# Altium PCB 175-00033, rev2, Crate Slot Power Interface.PcbDoc (part 2 of 2)
Units mm, origin at the board's own origin, x right, y up, seen from the top; angles counter-clockwise.
Board outline 150 x 100 mm, 4 copper layers (Top Layer (*.GTL), Internal Plane 1 (*.GP1), Internal Plane 2 (*.GP2), Bottom Layer (*GBL)); 16 components, 13 nets, 1052 pads, 23 vias.
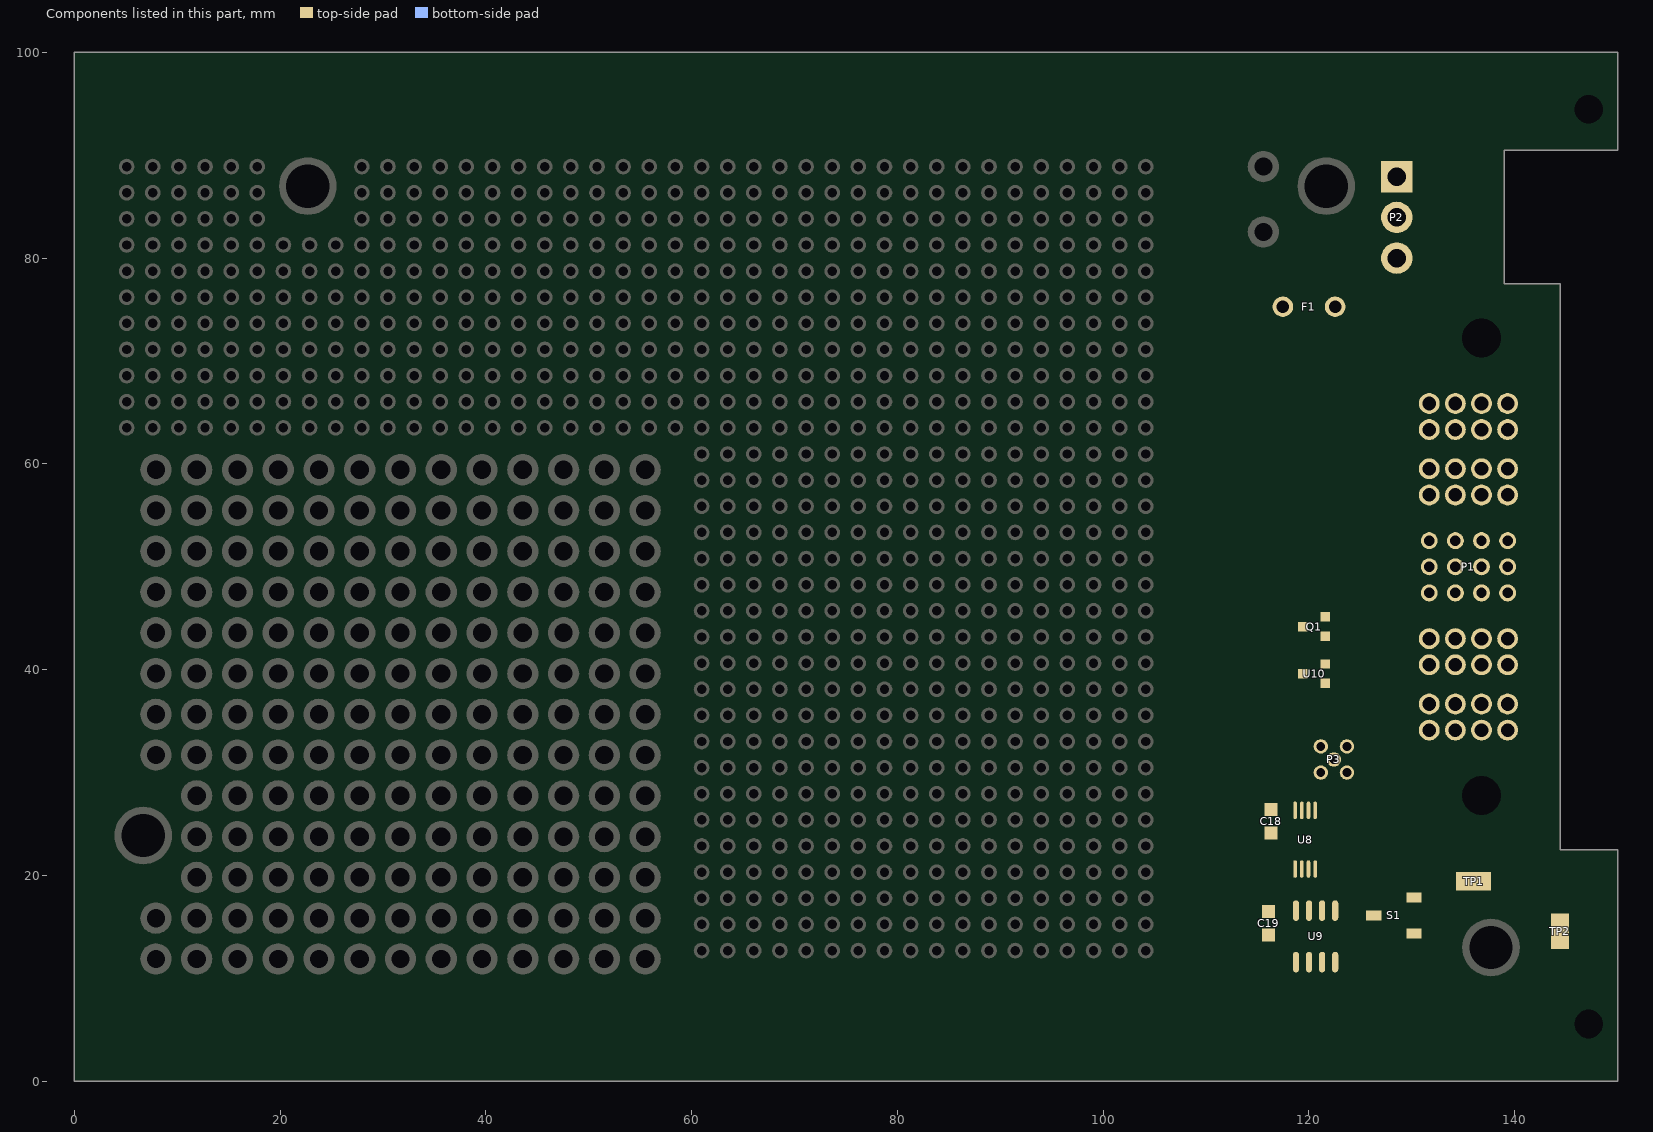
[diagram p4: the components of this part, seen from the top]

## Via types
v1: diameter 0.61, hole 0.254, Top Layer (*.GTL) to Bottom Layer (*GBL), 10 vias
v2: diameter 0.762, hole 0.381, Top Layer (*.GTL) to Bottom Layer (*GBL), 9 vias
v3: diameter 1.27, hole 0.711, Top Layer (*.GTL) to Bottom Layer (*GBL), 3 vias
v4: diameter 0.508, hole 0.254, Top Layer (*.GTL) to Bottom Layer (*GBL), 1 vias

## Nets (pads, with @x,y where several pads share a name; then routed paths per layer and width w, separated by ;. In a path a pad name is that pad's centre, name@x,y a point inside that pad or via, vN(x,y) a via of type N, cw(c..) or ccw(c..) an arc to the next point about the centre after c; other vN are vias at no path point) (continued)
copper on no net: | length 2262.8
  Top Layer (*.GTL) w0.508: 5.08,63.5 7.62,63.5 ; 5.08,66.04 7.62,66.04 ; 5.08,68.58 7.62,68.58 ; 5.08,71.12 7.62,71.12 ; 5.08,73.66 7.62,73.66 ; 5.08,76.2 7.62,76.2 ; 5.08,78.74 7.62,78.74 ; 5.08,81.28 7.62,81.28 ; 5.08,83.82 7.62,83.82 ; 5.08,86.36 7.62,86.36 ; 5.08,88.9 7.62,88.9 ; 10.16,63.335 10.16,78.74 10.16,88.9 ; 12.7,63.335 12.7,78.74 12.7,88.9 ; 15.24,63.5 22.86,63.5 ; 15.24,66.04 22.86,66.04 ; 15.24,68.58 22.86,68.58 ; 15.24,71.12 22.86,71.12 ; 15.24,73.66 22.86,73.66 ; 15.24,76.2 22.86,76.2 ; 15.24,78.74 22.86,78.74 ; 15.24,81.28 22.86,81.28 ; 15.24,83.82 17.78,83.82 ; 15.24,86.36 17.78,86.36 ; 15.24,88.9 17.78,88.9 ; 25.4,63.762 25.4,78.74 ; 27.94,64.085 27.94,78.74 27.94,89 ; 30.48,63.5 38.1,63.5 ; 30.48,66.04 38.1,66.04 ; 30.48,68.58 38.1,68.58 ; 30.48,71.12 38.1,71.12 ; 30.48,73.66 38.1,73.66 ; 30.48,76.2 38.1,76.2 ; 30.48,78.74 38.1,78.74 ; 30.48,81.28 38.1,81.28 ; 30.48,83.82 38.1,83.82 ; 30.48,86.36 38.1,86.36 ; 30.48,88.9 38.1,88.9 ; 40.64,63.5 40.64,78.74 40.64,89 ; 43.18,63.335 43.18,78.74 43.18,89 ; 45.72,63.5 53.34,63.5 ; 45.72,66.04 53.34,66.04 ; 45.72,68.58 53.34,68.58 ; 45.72,71.12 53.34,71.12 ; 45.72,73.66 53.34,73.66 ; 45.72,76.2 53.34,76.2 ; 45.72,78.74 53.34,78.74 ; 45.72,81.28 53.34,81.28 ; 45.72,83.82 53.34,83.82 ; 45.72,86.36 53.34,86.36 ; 45.72,88.9 53.34,88.9 ; 55.88,63.5 55.88,78.74 55.88,89 ; 58.42,63.335 58.42,78.74 58.42,89 ; 60.96,12.7 68.58,12.7 ; 60.96,15.24 68.58,15.24 ; 60.96,17.78 68.58,17.78 ; 60.96,20.32 68.58,20.32 ; 60.96,22.86 68.58,22.86 ; 60.96,25.4 68.58,25.4 ; 60.96,27.94 68.58,27.94 ; 60.96,30.48 68.58,30.48 ; 60.96,33.02 68.58,33.02 ; 60.96,35.56 68.58,35.56 ; 60.96,38.1 68.58,38.1 ; 60.96,40.64 68.58,40.64 ; 60.96,43.18 68.58,43.18 ; 60.96,45.72 68.58,45.72 ; 60.96,48.26 68.58,48.26 ; 60.96,50.8 68.58,50.8 ; 60.96,53.34 68.58,53.34 ; 60.96,55.88 68.58,55.88 ; 60.96,58.42 68.58,58.42 ; 60.96,60.96 68.58,60.96 ; 60.96,63.5 68.58,63.5 ; 60.96,66.04 68.58,66.04 ; 60.96,68.58 68.58,68.58 ; 60.96,71.12 68.58,71.12 ; 60.96,73.66 68.58,73.66 ; 60.96,76.2 68.58,76.2 ; 60.96,78.74 68.58,78.74 ; 60.96,81.28 68.58,81.28 ; 60.96,83.82 68.58,83.82 ; 60.96,86.36 68.58,86.36 ; 60.96,88.9 68.58,88.9 ; 71.12,12.7 71.12,27.94 71.12,45.72 71.12,60.96 71.12,78.74 71.12,89 ; 73.66,12.7 73.66,27.94 73.66,45.72 73.66,60.96 73.66,78.74 73.66,89 ; 76.2,12.7 83.82,12.7 ; 76.2,15.24 83.82,15.24 ; 76.2,17.78 83.82,17.78 ; 76.2,20.32 83.82,20.32 ; 76.2,22.86 83.82,22.86 ; 76.2,25.4 83.82,25.4 ; 76.2,27.94 83.82,27.94 ; 76.2,30.48 83.82,30.48 ; 76.2,33.02 83.82,33.02 ; 76.2,35.56 83.82,35.56 ; 76.2,38.1 83.82,38.1 ; 76.2,40.64 83.82,40.64 ; 76.2,43.18 83.82,43.18 ; 76.2,45.72 83.82,45.72 ; 76.2,48.26 83.82,48.26 ; 76.2,50.8 83.82,50.8 ; 76.2,53.34 83.82,53.34 ; 76.2,55.88 83.82,55.88 ; 76.2,58.42 83.82,58.42 ; 76.2,60.96 83.82,60.96 ; 76.2,63.5 83.82,63.5 ; 76.2,66.04 83.82,66.04 ; 76.2,68.58 83.82,68.58 ; 76.2,71.12 83.82,71.12 ; 76.2,73.66 83.82,73.66 ; 76.2,76.2 83.82,76.2 ; 76.2,78.74 83.82,78.74 ; 76.2,81.28 83.82,81.28 ; 76.2,83.82 83.82,83.82 ; 76.2,86.36 83.82,86.36 ; 76.2,88.9 83.82,88.9 ; 86.36,12.7 86.36,27.94 86.36,45.72 86.36,60.96 86.36,78.74 86.36,89 ; 88.9,12.7 88.9,27.94 88.9,45.72 88.9,60.96 88.9,78.74 88.9,89 ; 91.44,12.7 99.06,12.7 ; 91.44,15.24 99.06,15.24 ; 91.44,17.78 99.06,17.78 ; 91.44,20.32 99.06,20.32 ; 91.44,22.86 99.06,22.86 ; 91.44,25.4 99.06,25.4 ; 91.44,27.94 99.06,27.94 ; 91.44,30.48 99.06,30.48 ; 91.44,33.02 99.06,33.02 ; 91.44,35.56 99.06,35.56 ; 91.44,38.1 99.06,38.1 ; 91.44,40.64 99.06,40.64 ; 91.44,43.18 99.06,43.18 ; 91.44,45.72 99.06,45.72 ; 91.44,48.26 99.06,48.26 ; 91.44,50.8 99.06,50.8 ; 91.44,53.34 99.06,53.34 ; 91.44,55.88 99.06,55.88 ; 91.44,58.42 99.06,58.42 ; 91.44,60.96 99.06,60.96 ; 91.44,63.5 99.06,63.5 ; 91.44,66.04 99.06,66.04 ; 91.44,68.58 99.06,68.58 ; 91.44,71.12 99.06,71.12 ; 91.44,73.66 99.06,73.66 ; 91.44,76.2 99.06,76.2 ; 91.44,78.74 99.06,78.74 ; 91.44,81.28 99.06,81.28 ; 91.44,83.82 99.06,83.82 ; 91.44,86.36 99.06,86.36 ; 91.44,88.9 99.06,88.9 ; 101.6,12.7 101.6,27.94 101.6,45.72 101.6,60.96 101.6,78.74 101.6,89 ; 104.14,12.7 104.14,27.94 104.14,45.72 104.14,60.96 104.14,78.74 104.14,89
  Top Layer (*.GTL) w1.016: 7.62,11.887 24.892,11.887 ; 7.925,15.85 23.774,15.85 ; 7.925,31.699 24.892,31.699 ; 7.925,35.662 24.892,35.662 13.005,35.662 ; 7.925,39.624 24.892,39.624 13.005,39.624 ; 7.925,43.586 24.892,43.586 13.005,43.586 ; 7.925,47.549 24.892,47.549 13.005,47.549 ; 7.925,51.511 24.892,51.511 13.005,51.511 ; 7.925,55.474 24.892,55.474 13.005,55.474 ; 7.925,59.436 24.892,59.436 13.005,59.436 ; 13.005,19.812 24.892,19.812 ; 13.005,23.774 24.892,23.774 ; 13.005,27.737 24.892,27.737 ; 27.737,11.887 27.737,35.662 27.737,59.436 ; 31.699,11.577 31.699,35.662 31.699,59.436 ; 35.662,11.887 47.549,11.887 ; 35.662,15.85 47.549,15.85 ; 35.662,19.812 47.549,19.812 ; 35.662,23.774 47.549,23.774 ; 35.662,27.737 47.549,27.737 ; 35.662,31.699 47.549,31.699 ; 35.662,35.662 47.549,35.662 ; 35.662,39.624 47.549,39.624 ; 35.662,43.586 47.549,43.586 ; 35.662,47.549 47.549,47.549 ; 35.662,51.511 47.549,51.511 ; 35.662,55.474 47.549,55.474 ; 35.662,59.436 47.549,59.436 ; 51.511,11.887 51.511,59.436 ; 55.474,11.887 55.474,59.436
  Bottom Layer (*GBL) w0.203: 119.177,69.24 ccw(c118.221,69.24) 119.177,69.24

## Polygon pours and split planes (outlines as drawn)
+24V_FUSED on Internal Plane 1 (*.GP1) (split plane): 149.49,91.01 139,91.01 138.9,91.001 138.805,90.972 138.716,90.924 138.639,90.861 138.576,90.784 138.528,90.695 138.499,90.6 138.49,90.5 138.49,77.565 120,77.565 119.975,77.56 119.954,77.546 119.94,77.525 119.935,77.5 119.935,72.065 113,72.065 113,99.49 149.49,99.49
+24V on Internal Plane 1 (*.GP1) (split plane): 138.499,77.4 138.528,77.305 138.576,77.216 138.639,77.139 138.716,77.076 138.805,77.028 138.9,76.999 139,76.99 143.89,76.99 143.89,22.5 143.899,22.4 143.928,22.305 143.976,22.216 144.039,22.139 144.116,22.076 144.205,22.028 144.3,21.999 144.4,21.99 149.49,21.99 149.49,0.51 113,0.51 113,71.871 113.025,71.875 113.046,71.889 113.06,71.91 113.065,71.935 120,71.935 120.025,71.94 120.046,71.954 120.06,71.975 120.065,72 120.065,77.435 138.496,77.435
+24V on Internal Plane 1 (*.GP1) (split plane): 107,0.51 0.51,0.51 0.51,99.49 107,99.49
GND on Internal Plane 2 (*.GP2) (split plane): 149.49,91.01 139,91.01 138.9,91.001 138.805,90.972 138.716,90.924 138.639,90.861 138.576,90.784 138.528,90.695 138.499,90.6 138.49,90.5 138.49,77.5 138.499,77.4 138.528,77.305 138.576,77.216 138.639,77.139 138.716,77.076 138.805,77.028 138.9,76.999 139,76.99 143.89,76.99 143.89,22.5 143.899,22.4 143.928,22.305 143.976,22.216 144.039,22.139 144.116,22.076 144.205,22.028 144.3,21.999 144.4,21.99 149.49,21.99 149.49,0.51 113,0.51 113,99.49 149.49,99.49
GND on Internal Plane 2 (*.GP2) (split plane): 107,0.51 0.51,0.51 0.51,99.49 107,99.49

## Keep-outs
Keep-Out Layer:
  circle w0.127: c118.19,50.919 r2.5
  lines w0.203: 2.245,91.923 2.245,8.103 6.69,8.103 6.69,3.023 144.797,3.023 144.797,8.103 148.607,8.103 148.607,91.923 144.797,91.923 144.797,97.003 6.69,97.003 6.69,91.923

## Other copper
Top Layer (*.GTL):
  text "*.GTL - TOP LAYER GERBER DATA" at 41.758,-33.426 h2.03
Bottom Layer (*GBL):
  text "175-00033 Rev 2" at 114.275,70.891 h1.02 r90
  text "Crate Slot Pwr Interface" at 116.459,70.764 h1.02 r90
  text "c  2011, LCOGT" at 118.542,69.621 h1.02 r90
  text "*.GBL - BOTTOM LAYER GERBER DATA" at 41.758,-33.426 h2.03
Internal Plane 1 (*.GP1) (plane layer: these items are gaps in the copper):
  pour cut-out: 107,100 107,0 113,0 113,100
  lines w0.127: 110,71.935 113,71.935 ; 113,72 120,72 120,77.5 139,77.5
  text "*.GP1 - INTERNAL PLANE LAYER 1 GERBER DATA" at 41.758,-33.426 h2.03
Internal Plane 2 (*.GP2) (plane layer: these items are gaps in the copper):
  pour cut-out: 107,100 107,0 113,0 113,100
  text "*.GP2 - INTERNAL PLANE LAYER 2 GERBER DATA" at 41.758,-33.426 h2.03

## Silkscreen, mask and mechanical layers (free items; w line width, h text height)
Top Overlay:
  circle w0.254: c147.195,5.563 r2.857
  circle w0.254: c147.195,94.463 r2.857
  rectangle: 134.23,3.512 140.296,7.052
  lines w0.127: 113,73.261 113,58 127,58 127,73.261
  lines w1: 141.69,10.327 141.69,8 1.69,8 1.69,92 131.173,92 141.69,92
  text "+24V" at 123.69,89.823 h1.02
  text "+24V" at 113.53,85.63 h1.02
  text "GND" at 123.622,83.007 h1.02
  text "GND" at 114.275,79.35 h1.02
  text "+24V" at 122.403,79.35 h1.02
  text "1Hz GPS" at 119.306,34 h1.02
  text "GND" at 135,21 h1.02
  text "+24V" at 141.91,17.209 h1.27
  text "PGM" at 128.665,11.865 h1.02
  text "SCH, 780-00036 rev:" at 115,5 h1.02
  text "CRATE SLOT PWR INTERFACE" at 113.783,2 h1.02
  text "*.GTO - TOP OVERLAY GERBER DATA" at 41.758,-33.426 h2.03
Top Paste:
  text "*.GTP - TOP-SIDE SOLDER PASTE MASK" at 41.757,-33.426 h2.03
Top Solder:
  text "*.GTS - TOP SOLDER MASK GERBER DATA" at 41.758,-33.426 h2.03
Bottom Solder:
  rectangle: 112.547,46.152 119.532,72.263
  text "*.GBS - BOTTOM SOLDER MASK GERBER DATA" at 41.758,-33.426 h2.03
Mechanical 1:
  the board outline again, w1
Mechanical 2:
  lines w0.254: -259.69,-251.181 -259.69,155.219 273.71,155.219 273.71,-251.181 -259.69,-251.181 ; 170.713,-248.488 ccw(c171.983,-248.488) 171.983,-249.758 180.365,-249.758 ccw(c180.365,-248.742) 181.381,-248.742 181.381,-244.424 ccw(c180.365,-244.424) 180.365,-243.408 170.713,-243.408 170.713,-248.488 ; 170.713,-241.122 ccw(c171.983,-241.122) 171.983,-242.392 271.043,-242.392 ccw(c271.043,-241.122) 272.313,-241.122 272.313,-236.296 ccw(c271.043,-236.296) 271.043,-235.026 170.713,-235.026 170.713,-241.122 ; 170.713,-232.74 ccw(c171.983,-232.74) 171.983,-234.01 219.735,-234.01 ccw(c219.735,-232.74) 221.005,-232.74 221.005,-228.93 ccw(c219.735,-228.93) 219.735,-227.66 170.713,-227.66 170.713,-232.74 ; 170.713,-225.628 ccw(c171.729,-225.628) 171.729,-226.644 192.303,-226.644 ccw(c192.303,-225.374) 193.573,-225.374 193.573,-221.564 ccw(c192.303,-221.564) 192.303,-220.294 170.713,-220.294 170.713,-225.628 ; 182.397,-248.742 ccw(c183.413,-248.742) 183.413,-249.758 233.197,-249.758 ccw(c233.197,-248.742) 234.213,-248.742 234.213,-244.424 ccw(c233.197,-244.424) 233.197,-243.408 182.397,-243.408 182.397,-248.742 ; 194.589,-225.374 ccw(c195.859,-225.374) 195.859,-226.644 219.735,-226.644 ccw(c219.735,-225.374) 221.005,-225.374 221.005,-221.564 ccw(c219.735,-221.564) 219.735,-220.294 194.589,-220.294 194.589,-225.374 ; 222.021,-232.74 ccw(c223.291,-232.74) 223.291,-234.01 271.043,-234.01 ccw(c271.043,-232.74) 272.313,-232.74 272.313,-228.93 ccw(c271.043,-228.93) 271.043,-227.66 222.021,-227.66 222.021,-232.74 ; 222.021,-225.374 ccw(c223.291,-225.374) 223.291,-226.644 247.167,-226.644 ccw(c247.167,-225.374) 248.437,-225.374 248.437,-221.564 ccw(c247.167,-221.564) 247.167,-220.294 222.021,-220.294 222.021,-225.374 ; 235.229,-248.488 ccw(c236.499,-248.488) 236.499,-249.758 244.881,-249.758 ccw(c244.881,-248.742) 245.897,-248.742 245.897,-244.424 ccw(c244.881,-244.424) 244.881,-243.408 235.229,-243.408 235.229,-248.488 ; 246.913,-248.742 ccw(c247.929,-248.742) 247.929,-249.758 271.043,-249.758 ccw(c271.043,-248.488) 272.313,-248.488 272.313,-244.678 ccw(c271.043,-244.678) 271.043,-243.408 246.913,-243.408 246.913,-248.742 ; 249.453,-225.374 ccw(c250.723,-225.374) 250.723,-226.644 271.043,-226.644 ccw(c271.043,-225.374) 272.313,-225.374 272.313,-221.564 ccw(c271.043,-221.564) 271.043,-220.294 249.453,-220.294 249.453,-225.374
  lines w0.356: -224.536,-147.938 -106.274,-147.938 ; -224.536,-141.334 -106.274,-141.334 ; -226.06,-201.524 ccw(c-223.926,-201.524) -223.926,-203.657 -106.883,-203.657 ccw(c-106.883,-201.524) -104.75,-201.524 -104.75,-122.479 ccw(c-106.883,-122.479) -106.883,-120.345 -223.926,-120.345 ccw(c-223.926,-122.479) -226.06,-122.479 -226.06,-201.524
  lines w0.508: -259.18,-234.775 cw(c-257.912,-236.677) -257.912,-234.391 ; -257.912,-235.407 ccw(c-257.912,-236.677) -259.182,-236.677 -259.182,-249.123 ccw(c-257.912,-249.123) -257.912,-250.393 -176.632,-250.393 ccw(c-176.632,-249.123) -175.362,-249.123 -175.362,-240.487 ccw(c-176.632,-240.487) -176.632,-239.217 -243.688,-239.217 ; -174.73,-250.392 ccw(c-176.632,-249.123) -174.346,-249.123 -174.346,-240.487 ; 169.6,-250.774 cw(c171.983,-248.488) 168.681,-248.488 168.681,-206.07 cw(c171.983,-206.07) 171.983,-202.768 271.043,-202.768 cw(c271.043,-206.07) 273.295,-203.655 ; -68.428,-246.609 ccw(c-65.126,-246.609) -65.126,-249.911 55.27,-249.911 ccw(c55.27,-246.609) 58.572,-246.609 58.572,-206.223 ccw(c55.27,-206.223) 55.27,-202.921 -65.126,-202.921 ccw(c-65.126,-206.223) -68.428,-206.223 -68.428,-246.609 ; 169.697,-248.488 ccw(c171.983,-248.488) 171.983,-250.774 271.043,-250.774 ccw(c271.043,-248.488) 273.329,-248.488 273.329,-206.07 ccw(c271.043,-206.07) 271.043,-203.784 171.983,-203.784 ccw(c171.983,-206.07) 169.697,-206.07 169.697,-248.488
  lines w0.61: -3.658,-245.847 0.152,-245.847 ; -3.658,-239.497 0.152,-239.497 ; -3.658,-233.147 0.152,-233.147 ; -3.658,-226.797 0.152,-226.797 ; -3.658,-220.447 0.152,-220.447
  lines w0.762: -272.39,-263.881 -272.39,167.919 286.41,167.919 286.41,-263.881 -272.39,-263.881
  lines w1.27: 174.396,-216.51 216.306,-216.51 ; 174.396,-206.858 216.306,-206.858 ; 216.306,-216.51 216.306,-206.858 ; 216.306,-216.51 174.142,-216.51 174.142,-206.858 216.306,-206.858
  text "NOTES (UNLESS OTHERWISE SPECIFIED):" at -251.562,141.91 h2.29
  text "GENERAL" at -249.022,136.83 h2.29
  text "1)" at -246.482,131.749 h1.91
  text "PCB IS 4-LAYER, .062\" THICK." at -241.402,131.749 h1.91
  text "2)" at -246.482,127.939 h1.91
  text "CONSTRUCTION IS SOLDER-MASK-OVER-BARE-COPPER (SMOBC)." at -241.402,127.939 h1.91
  text "3)" at -246.482,124.129 h1.91
  text "ACCEPTABILITY SHALL BE BASED ON IPC-A-600, CLASS 2." at -241.402,124.129 h1.91
  text "4)" at -246.482,120.319 h1.91
  text "THE FOLLOWING GERBER RS274X PHOTO TOOL FILES SHALL BE USED TO DEFINE ALL CIRCUIT FEATURES:" at -241.402,120.319 h1.91
  text "*.GTL - TOP LAYER GERBER DATA" at -234.442,114.96 h2.03
  text "*.GP1 - INTERNAL PLANE LAYER 1 GERBER DATA" at -234.442,99.348 h2.03
  text "*.GP2 - INTERNAL PLANE LAYER 2 GERBER DATA" at -234.442,95.445 h2.03
  text "*.GBL - BOTTOM LAYER GERBER DATA" at -234.442,79.832 h2.03
  text "*.GTO - TOP OVERLAY GERBER DATA" at -234.442,75.929 h2.03
  text "*.GTS - TOP SOLDER MASK GERBER DATA" at -234.442,72.026 h2.03
  text "*.GTP - TOP-SIDE SOLDER PASTE MASK" at -234.442,68.123 h2.03
  text "*.GBS - BOTTOM SOLDER MASK GERBER DATA" at -234.442,60.317 h2.03
  text "5)" at -248.945,38.233 h1.91
  text "THE PHOTO TOOL SHALL NOT BE COMPENSATED WITHOUT PRIOR ENGINEERING APPROVAL." at -243.865,38.233 h1.91
  text "PCB DESIGNER: RICH LOBDILL   PH (805) 880-1621  FAX (805) 961-1792." at -243.865,34.424 h1.91
  text "FABRICATION TOLERANCES" at -247.548,26.137 h2.29
  text "6)" at -245.008,21.055 h1.91
  text "END PRODUCT CONDUCTOR WIDTHS AND PAD DIAMETERS SHALL NOT VARY MORE THAN" at -239.928,21.055 h1.91
  text "0.002\" FROM THE 1:1 DIMENSIONS OF THE MASTER ARTWORK." at -239.928,17.247 h1.91
  text "7)" at -245.008,13.435 h1.91
  text "THE CONDUCTIVE PATTERN SHALL BE POSITIONED SO THAT THE LOCATION OF ANY PAD OR" at -239.928,13.435 h1.91
  text "LAND SHALL BE WITHIN 0.005\" DIAMETER TO THE TRUE POSITION OF THE HOLE IT CIRCUMSCRIBES." at -239.928,9.627 h1.91
  text "8)" at -245.008,5.815 h1.91
  text "ALL DRILL HOLE SIZES AND TOLERANCES APPLY AFTER PLATING." at -239.928,5.815 h1.91
  text "9)" at -245.008,2.005 h1.91
  text "THE MINIMUM ANNULAR RING SHALL BE 0.005\"." at -239.928,2.005 h1.91
  text "10)" at -246.405,-1.805 h1.91
  text "BOW AND TWIST SHALL NOT EXCEED 0.010\" PER INCH." at -239.928,-1.805 h1.91
  text "11)" at -246.151,-5.615 h1.91
  text "FOR PCB ROUTING DIMENSIONS: .XXX = +/-.005\"  .XX = +/-.020\"" at -239.928,-5.615 h1.91
  text "MATERIAL" at -247.548,-10.693 h2.29
  text "12)" at -246.405,-15.775 h1.91
  text "BASE MATERIAL IS FR4 EPOXY FIBERGLASS" at -239.751,-15.926 h1.91
  text "SEE STACK-UP LEGEND FOR COPPER CLADDING CALL OUTS" at -239.751,-19.482 h1.91
  text "13)" at -246.405,-19.585 h1.91
  text "PLATING" at -247.548,-24.663 h2.29
  text "14)" at -246.405,-29.618 h1.91
  text "ALL HOLES AND CONDUCTIVE SURFACES SHALL BE PLATED WITH A MINIMUM OF 0.001\" COPPER." at -239.928,-29.618 h1.91
  text "15)" at -246.405,-33.428 h1.91
  text "AFTER SOLDERMASK, ALL EXPOSED HOLES AND CONDUCTIVE SURFACES SHALL BE COATED" at -239.928,-33.428 h1.91
  text "WITH A GOLD IMMERSION PLATING TO PRESERVE SOLDERABILITY." at -239.751,-37.262 h1.91
  text "15.1)" at -245.974,-43.029 h1.91
  text "COPPER THEVING ON LAYERS AS NEEDED" at -237.658,-43.456 h1.91
  text "COATINGS" at -247.955,-51.74 h2.29
  text "16)" at -246.685,-56.694 h1.91
  text "THE SOLDERMASK SHALL BE BLACK LIQUID PHOTO-IMAGEABLE PER IPC-SM-840, TYPE-B, CLASS 2." at -240.335,-56.694 h1.91
  text "17)" at -246.812,-60.504 h1.91
  text "THE SOLDERMASK REGISTRATION ALLOWANCE IS 0.003\".  THERE SHALL BE NO SOLDERMASK ON" at -240.335,-60.504 h1.91
  text "ANY SOLDER PAD OR LAND." at -240.335,-64.314 h1.91
  text "MARKING" at -247.955,-69.393 h2.29
  text "18)" at -246.812,-74.347 h1.91
  text "THE LEGEND SHALL BE SCREEN-PRINTED USING PERMANENT YELLOW EPOXY INK." at -240.335,-74.347 h1.91
  text "19)" at -246.812,-78.157 h1.91
  text "THE SCREEN PRINTING REGISTRATION ALLOWANCE IS 0.007\".  THERE SHALL BE NO INK ON ANY" at -240.335,-78.157 h1.91
  text "SOLDER PAD OR LAND." at -240.335,-81.966 h1.91
  text "20)" at -247.066,-85.777 h1.91
  text "THE VENDOR CODE AND UL FLAMMABILITY RATING MAY BE ETCHED IN THE FOIL OR MARKED IN" at -240.335,-85.777 h1.91
  text "PERMANENT EPOXY INK (VENDOR'S OPTION)." at -240.335,-89.586 h1.91
  text "ELECTRICAL TESTING" at -247.955,-94.666 h2.29
  text "21)" at -246.812,-99.62 h1.91
  text "ALL BOARDS SHALL BE ELECTRICALLY TESTED TO THE SUPPLIED IPC-D-356A NET LIST" at -240.335,-99.62 h1.91
  text "FOR CONTINUITY, OPENS AND SHORTS." at -240.335,-103.429 h1.91
  text "Layer Stack Up Detail for: 175-00033, rev2, Crate Slot Power Interface.PcbDoc" at -224.536,-131.881 h1.52
  text "Layer" at -224.536,-143.798 h1.52
  text "COPPER THICKNESS" at -167.056,-146.075 h2.54
  text "Name" at -224.536,-146.846 h1.52
  text "Top Layer (*.GTL)" at -224.536,-154.424 h2.13
  text "1/2 oz,  1 oz Finished" at -165.202,-154.864 h2.54
  text "2 oz" at -163.982,-166.7 h2.54
  text "Internal Plane 1 (*.GP1)" at -224.536,-167.039 h2.13
  text "2 oz" at -164.389,-178.74 h2.54
  text "Internal Plane 2 (*.GP2)" at -224.536,-179.654 h2.13
  text "1/2 oz,  1 oz Finished" at -164.795,-190.805 h2.54
  text "Bottom Layer (*GBL)" at -224.536,-192.27 h2.13
  text "Las Cumbres Observatory, Inc." at 220.624,-207.366 h2.29
  text "Las Cumbres Observatory" at 175.666,-210.414 h3.81
  text "PRIMARY PCB SPECIFICATIONS" at -57.074,-210.795 h5.08
  text "6740 Cortona Dr." at 231.8,-211.277 h2.29
  text "Global Telescope Network" at 179.73,-214.478 h3.17
  text "Goleta, CA 93117" at 230.53,-215.087 h2.29
  text "(REFER TO COMPLETE SPEC LISTING AT LEFT FOR FURTHER DETAILS)" at -65.888,-216.002 h2.54
  text "www.lcogt.net" at 234.086,-218.796 h2.29
  text "DATE" at 171.221,-221.61 h0.81
  text "DESIGNED" at 195.097,-221.61 h0.81
  text "DRAWN" at 222.529,-221.61 h0.81
  text "SCALE" at 249.961,-221.61 h0.81
  text "NUMBER OF LAYERS" at -63.348,-222.352 h3.81
  text "4" at 26.822,-222.352 h3.81
  text "Rich Lobdill" at 230.276,-224.13 h1.4
  text "Rich Lobdill" at 201.701,-224.257 h1.4
  text "1 : 1" at 257.2,-224.612 h2.29
  text "11/11/2011" at 171.983,-224.79 h2.29
  text "FINISHED THICKNESS" at -63.348,-228.702 h3.81
  text ".062\"" at 22.377,-228.702 h3.81
  text "CHECKED/DATE" at 171.221,-228.976 h0.81
  text "APPROVED/DATE" at 222.529,-228.976 h0.81
  text "BASE MATERIAL" at -63.348,-235.052 h3.81
  text "FR4" at 20.472,-235.052 h3.81
  text "TITLE" at 171.221,-236.342 h0.81
  text "175-00033, Crate Slot Power Interface" at 176.809,-240.005 h2.54
  text "GOLD IMMERSION" at 7.925,-240.563 h3.81
  text "PLATING TYPE" at -63.348,-241.402 h3.81
  text "THIS DRAWING EMBODIES A PROPRIETARY DESIGN OWNED BY LAS CUMBRES" at -256.896,-242.011 h1.52
  text "OBSERVATORY.  IT IS SUBMITTED FOR A SPECIFIC PURPOSE UNDER A CON-" at -256.896,-244.551 h1.52
  text "SIZE" at 171.221,-244.724 h0.81
  text "DOC NO." at 182.905,-244.724 h0.81
  text "REV" at 235.737,-244.724 h0.81
  text "SHEET" at 247.421,-244.724 h0.81
  text "FIDENTIAL RELATIONSHIP, AND EXCEPT FOR PURPOSES EXPRESSLY GRANTED" at -256.896,-246.964 h1.52
  text "OF" at 258.343,-247.345 h1.52
  text "SOLDER MASK COLOR" at -63.348,-247.752 h3.81
  text "BLACK" at 23.647,-247.752 h3.81
  text "1" at 254.025,-247.853 h2.54
  text "X" at 264.185,-247.853 h2.54
  text "2" at 239.42,-248.183 h3.3
  text "-" at 197.002,-248.234 h3.3
  text "GPT" at 215.283,-248.61 h3.3
  text "C" at 174.65,-248.641 h2.54
  text "IN WRITING, ALL RIGHTS ARE RESERVED BY LAS CUMBRES OBSERVATORY." at -256.896,-249.25 h1.52
Mechanical 3:
  lines w0.127: 110,0 150,0
Mechanical 5:
  text "175-00033, Rev 2, Crate Slot Power Interface" at 42.292,-22.49 h2.03
  text "LAS CUMBRES OBSERVATORY     11/11/2011" at 42.292,-26.3 h2.03
Drill Drawing:
  lines w0.254: -259.69,-251.181 -259.69,155.219 273.71,155.219 273.71,-251.181 -259.69,-251.181 ; 170.713,-248.488 ccw(c171.983,-248.488) 171.983,-249.758 180.365,-249.758 ccw(c180.365,-248.742) 181.381,-248.742 181.381,-244.424 ccw(c180.365,-244.424) 180.365,-243.408 170.713,-243.408 170.713,-248.488 ; 170.713,-241.122 ccw(c171.983,-241.122) 171.983,-242.392 271.043,-242.392 ccw(c271.043,-241.122) 272.313,-241.122 272.313,-236.296 ccw(c271.043,-236.296) 271.043,-235.026 170.713,-235.026 170.713,-241.122 ; 170.713,-232.994 ccw(c171.729,-232.994) 171.729,-234.01 207.797,-234.01 ccw(c207.797,-232.74) 209.067,-232.74 209.067,-228.93 ccw(c207.797,-228.93) 207.797,-227.66 170.713,-227.66 170.713,-232.994 ; 182.397,-248.742 ccw(c183.413,-248.742) 183.413,-249.758 233.197,-249.758 ccw(c233.197,-248.742) 234.213,-248.742 234.213,-244.424 ccw(c233.197,-244.424) 233.197,-243.408 182.397,-243.408 182.397,-248.742 ; 210.083,-232.74 ccw(c211.353,-232.74) 211.353,-234.01 247.167,-234.01 ccw(c247.167,-232.74) 248.437,-232.74 248.437,-228.93 ccw(c247.167,-228.93) 247.167,-227.66 210.083,-227.66 210.083,-232.74 ; 235.229,-248.488 ccw(c236.499,-248.488) 236.499,-249.758 244.881,-249.758 ccw(c244.881,-248.742) 245.897,-248.742 245.897,-244.424 ccw(c244.881,-244.424) 244.881,-243.408 235.229,-243.408 235.229,-248.488 ; 246.913,-248.742 ccw(c247.929,-248.742) 247.929,-249.758 271.043,-249.758 ccw(c271.043,-248.488) 272.313,-248.488 272.313,-244.678 ccw(c271.043,-244.678) 271.043,-243.408 246.913,-243.408 246.913,-248.742 ; 249.453,-232.74 ccw(c250.723,-232.74) 250.723,-234.01 271.043,-234.01 ccw(c271.043,-232.74) 272.313,-232.74 272.313,-228.93 ccw(c271.043,-228.93) 271.043,-227.66 249.453,-227.66 249.453,-232.74
  lines w0.508: -259.053,-235.156 cw(c-257.785,-237.058) -257.785,-234.772 ; -257.785,-235.788 ccw(c-257.785,-237.058) -259.055,-237.058 -259.055,-249.504 ccw(c-257.785,-249.504) -257.785,-250.774 -176.505,-250.774 ccw(c-176.505,-249.504) -175.235,-249.504 -175.235,-240.868 ccw(c-176.505,-240.868) -176.505,-239.598 -243.561,-239.598 ; -174.603,-250.773 ccw(c-176.505,-249.504) -174.219,-249.504 -174.219,-240.868 ; 169.568,-250.74 cw(c171.983,-248.488) 168.681,-248.488 168.681,-227.66 cw(c170.713,-227.66) 170.713,-225.628 271.043,-225.628 cw(c271.043,-228.93) 273.295,-226.515 ; 169.697,-248.488 ccw(c171.983,-248.488) 171.983,-250.774 271.043,-250.774 ccw(c271.043,-248.488) 273.329,-248.488 273.329,-228.93 ccw(c271.043,-228.93) 271.043,-226.644 170.713,-226.644 ccw(c170.713,-227.66) 169.697,-227.66 169.697,-248.488
  lines w0.762: -272.39,-263.881 -272.39,167.919 286.41,167.919 286.41,-263.881 -272.39,-263.881
  text ".Legend" at 6.35,-146.609 h2.54
  text "DESIGNED" at 171.221,-228.976 h0.81
  text "DRAWN" at 210.591,-228.976 h0.81
  text "SCALE" at 249.961,-228.976 h0.81
  text "Rich Lobdill" at 183.566,-231.419 h1.4
  text "Rich Lobdill" at 223.215,-231.47 h1.4
  text "1 : 1" at 257.2,-231.978 h2.29
  text "TITLE" at 171.221,-236.342 h0.81
  text "175-00033, Crate Slot Power Interface" at 176.733,-240.005 h2.54
  text "THIS DRAWING EMBODIES A PROPRIETARY DESIGN OWNED BY LAS CUMBRES" at -256.769,-242.392 h1.52
  text "SIZE" at 171.221,-244.724 h0.81
  text "DOC NO." at 182.905,-244.724 h0.81
  text "REV" at 235.737,-244.724 h0.81
  text "SHEET" at 247.421,-244.724 h0.81
  text "OBSERVATORY.  IT IS SUBMITTED FOR A SPECIFIC PURPOSE UNDER A CON-" at -256.769,-244.932 h1.52
  text "FIDENTIAL RELATIONSHIP, AND EXCEPT FOR PURPOSES EXPRESSLY GRANTED" at -256.769,-247.345 h1.52
  text "OF" at 258.343,-247.345 h1.52
  text "2" at 253.644,-247.853 h2.54
  text "X" at 264.185,-247.853 h2.54
  text "-" at 197.002,-248.234 h3.3
  text "2" at 239.293,-248.234 h3.3
  text "C" at 174.65,-248.641 h3.05
  text "GD1" at 217.83,-248.641 h3.05
  text "IN WRITING, ALL RIGHTS ARE RESERVED BY LAS CUMBRES OBSERVATORY." at -256.769,-249.631 h1.52

## Dimensions
0,0 to 0,100 on Mechanical 2
0,0 to 150,0 on Mechanical 2
108.153,101.549 to 95.809,118.415 on Mechanical 2

## Text inside footprints (layer, text, board x,y; h text height)
P1: Top Overlay "15" at 128.388,57.747 h1.02; Top Overlay "14" at 128.007,41.364 h1.02; Top Overlay "12" at 128.515,51.905 h1.02; Top Overlay "4" at 129.023,46.952 h1.02; Top Overlay "16" at 128.261,64.097 h1.02; Top Overlay "13" at 128.261,35.014 h1.02; Top Overlay "PCB EDGE" at 146.93,43.65 h1.27 r90; Top Overlay "1" at 141.088,47.079 h1.02